# EAGLE board CoreExpansion (EAGLE 5.06)

Size 86.36 x 40.64 mm. Coordinates in mm from the lower left corner, seen from the top.
Outline: 0,0 86.36,0 86.36,40.64 0,40.64 0,0
Copper layers (1*16): Top 0.035mm / dielectric 1.5mm / Bottom 0.035mm
Design rules "default": minimum track width 10mil, minimum drill 0.6mm, track to track 8mil, track to pad 8mil, pad to pad 8mil, via to via 8mil, smd to smd 8mil, copper to edge 40mil, drill to drill 8mil, minimum pad ring 10mil, minimum via ring 8mil, stop-mask expansion 4mil, vias tented up to drill 0mil, thermal gap 10mil

## Footprints (pad centres in the part's own frame; a part is rotated, then mirrored left to right if it is on the bottom)
2X05/SHROUDED = drill 1.016 square: 1 -5.08,-1.27 | drill 1.016 octagon: 2 -5.08,1.27; 3 -2.54,-1.27; 4 -2.54,1.27; 5 0,-1.27; 6 0,1.27; 7 2.54,-1.27; 8 2.54,1.27; 9 5.08,-1.27; 10 5.08,1.27
C0805 = smd 1.3 x 1.5: 1 -0.95,0; 2 0.95,0
2X32/NOSILK = drill 1.016 octagon: 1 -39.37,-1.27; 2 -39.37,1.27; 3 -36.83,-1.27; 4 -36.83,1.27; 5 -34.29,-1.27; 6 -34.29,1.27; 7 -31.75,-1.27; 8 -31.75,1.27; 9 -29.21,-1.27; 10 -29.21,1.27; 11 -26.67,-1.27; 12 -26.67,1.27; 13 -24.13,-1.27; 14 -24.13,1.27; 15 -21.59,-1.27; 16 -21.59,1.27; 17 -19.05,-1.27; 18 -19.05,1.27; 19 -16.51,-1.27; 20 -16.51,1.27; 21 -13.97,-1.27; 22 -13.97,1.27; 23 -11.43,-1.27; 24 -11.43,1.27; 25 -8.89,-1.27; 26 -8.89,1.27; 27 -6.35,-1.27; 28 -6.35,1.27; 29 -3.81,-1.27; 30 -3.81,1.27; 31 -1.27,-1.27; 32 -1.27,1.27; 33 1.27,-1.27; 34 1.27,1.27; 35 3.81,-1.27; 36 3.81,1.27; 37 6.35,-1.27; 38 6.35,1.27; 39 8.89,-1.27; 40 8.89,1.27; 41 11.43,-1.27; 42 11.43,1.27; 43 13.97,-1.27; 44 13.97,1.27; 45 16.51,-1.27; 46 16.51,1.27; 47 19.05,-1.27; 48 19.05,1.27; 49 21.59,-1.27; 50 21.59,1.27; 51 24.13,-1.27; 52 24.13,1.27; 53 26.67,-1.27; 54 26.67,1.27; 55 29.21,-1.27; 56 29.21,1.27; 57 31.75,-1.27; 58 31.75,1.27; 59 34.29,-1.27; 60 34.29,1.27; 61 36.83,-1.27; 62 36.83,1.27; 63 39.37,-1.27; 64 39.37,1.27
1X05 = drill 1.016 square: 1 0,0 | drill 1.016 octagon: 2 2.54,0; 3 5.08,0; 4 7.62,0; 5 10.16,0
TSSOP-14 = smd 1.422 x 0.356: 1 -2.921,1.981; 2 -2.921,1.321; 3 -2.921,0.66; 4 -2.921,0; 5 -2.921,-0.66; 6 -2.921,-1.321; 7 -2.921,-1.981; 8 2.921,-1.981; 9 2.921,-1.321; 10 2.921,-0.66; 11 2.921,0; 12 2.921,0.66; 13 2.921,1.321; 14 2.921,1.981

## Placement (x,y rotation side)
ADC1  M05X2SHROUDED  [2X05/SHROUDED]  11.43,34.29 180 top
C1  0.1uF  [C0805]  63.5,30.48 270 bottom
C2  1uF  [C0805]  68.58,30.48 270 bottom
C3  0.1uF  [C0805]  66.04,30.48 270 bottom
C4  0.1uF  [C0805]  63.5,17.78 270 bottom
C5  1uF  [C0805]  68.58,17.78 270 bottom
C6  0.1uF  [C0805]  66.04,17.78 270 bottom
EXT1  M05X2SHROUDED  [2X05/SHROUDED]  54.61,34.29 180 top
EXT2  M05X2SHROUDED  [2X05/SHROUDED]  54.61,21.59 180 top
J1  CARDSTAC_FULL_STD_ROWS_AB_2X32_NOSILK  [2X32/NOSILK]  43.18,11.43 0 top
MOTOR1&2  M05X2SHROUDED  [2X05/SHROUDED]  33.02,34.29 180 top
MOTOR3&4  M05X2SHROUDED  [2X05/SHROUDED]  33.02,21.59 180 top
PWM1  M05X2SHROUDED  [2X05/SHROUDED]  11.43,21.59 180 top
RC1  M05PTH  [1X05]  82.55,36.83 180 top
RC1&2_LCV  MAX3393EEUD+  [TSSOP-14]  66.04,35.56 180 bottom
RC2  M05PTH  [1X05]  82.55,30.48 180 top
RC3  M05PTH  [1X05]  82.55,24.13 180 top
RC3&4_LVC  MAX3393EEUD+  [TSSOP-14]  66.04,22.86 180 bottom
RC4  M05PTH  [1X05]  82.55,17.78 180 top

## Library data of the parts
ADC1 C1-C6 EXT1 EXT2 J1 MOTOR1&2 MOTOR3&4 PWM1 RC1 RC1&2_LCV RC2 RC3 RC3&4_LVC RC4 = Robot

## Nets
3.3V: ADC1.2 C1.1 C4.1 EXT1.2 EXT2.2 J1.63 PWM1.2 RC1&2_LCV.1 RC1&2_LCV.8 RC3&4_LVC.1 RC3&4_LVC.8
5V: C2.1 C3.1 C5.1 C6.1 J1.64 RC1&2_LCV.14 RC1.4 RC2.4 RC3&4_LVC.14 RC3.4 RC4.4
ADC1_CLK: ADC1.3
ADC1_CS: ADC1.9
ADC1_MISO: ADC1.5
ADC1_MOSI: ADC1.7
EXT1_0: EXT1.3
EXT1_1: EXT1.4
EXT1_2: EXT1.5
EXT1_3: EXT1.6
EXT1_4: EXT1.7
EXT1_5: EXT1.8
EXT1_6: EXT1.9
EXT1_7: EXT1.10
EXT2_0: EXT2.3
EXT2_1: EXT2.4
EXT2_2: EXT2.5
EXT2_3: EXT2.6
EXT2_4: EXT2.7
EXT2_5: EXT2.8
EXT2_6: EXT2.9
GND: ADC1.1 C1.2 C2.2 C3.2 C4.2 C5.2 C6.2 EXT1.1 EXT2.1 J1.1 J1.13 J1.25 J1.37 J1.49 J1.61 MOTOR1&2.1 MOTOR1&2.6 MOTOR3&4.1 MOTOR3&4.6 PWM1.1 RC1&2_LCV.7 RC1.1 RC2.1 RC3&4_LVC.7 RC3.1 RC4.1
MOT1_BRAKE: MOTOR1&2.5
MOT1_DIR: MOTOR1&2.4
MOT1_PWM: MOTOR1&2.3
MOT2_BRAKE: MOTOR1&2.10
MOT2_DIR: MOTOR1&2.9
MOT2_PWM: MOTOR1&2.8
MOT3_BRAKE: MOTOR3&4.5
MOT3_DIR: MOTOR3&4.4
MOT3_PWM: MOTOR3&4.3
MOT4_BRAKE: MOTOR3&4.10
MOT4_DIR: MOTOR3&4.9
MOT4_PWM: MOTOR3&4.8
N$9: J1.60
N$10: J1.58
N$11: J1.56
N$12: J1.54
N$13: J1.52
N$14: J1.50
N$15: J1.48
N$16: J1.46
N$17: J1.44
N$18: J1.42
N$19: J1.40
N$20: J1.38
N$21: J1.36
N$22: J1.34
N$23: J1.32
N$24: J1.30
N$25: J1.28
N$26: J1.26
N$27: J1.24
N$28: J1.22
N$29: J1.20
N$30: J1.18
N$31: J1.16
N$32: J1.14
N$33: J1.12
N$34: J1.10
N$41: J1.7
N$42: J1.9
N$43: J1.11
N$44: J1.15
N$45: J1.17
N$46: J1.19
N$47: J1.21
N$48: J1.23
N$49: J1.27
N$50: J1.29
N$51: J1.31
N$52: J1.33
N$53: J1.35
N$54: J1.39
N$55: J1.41
N$56: J1.43
N$57: J1.45
N$58: J1.47
N$60: J1.53
N$61: J1.55
N$62: J1.57
PWM1_CH0: PWM1.3
PWM1_CH1: PWM1.4
PWM1_CH2: PWM1.5
PWM1_CH3: PWM1.6
PWM1_CH4: PWM1.7
PWM1_CH5: PWM1.8
PWM1_CH6: PWM1.9
PWM1_CH7: PWM1.10
RC1_CHA: RC1&2_LCV.2
RC1_CHA_5: RC1&2_LCV.13 RC1.3
RC1_CHB: RC1&2_LCV.3
RC1_CHB_5: RC1&2_LCV.12 RC1.5
RC2_CHA: RC1&2_LCV.4
RC2_CHA_5: RC1&2_LCV.11 RC2.3
RC2_CHB: RC1&2_LCV.5
RC2_CHB_5: RC1&2_LCV.10 RC2.5
RC3_CHA: RC3&4_LVC.2
RC3_CHA_5: RC3&4_LVC.13 RC3.3
RC3_CHB: RC3&4_LVC.3
RC3_CHB_5: RC3&4_LVC.12 RC3.5
RC4_CHA: RC3&4_LVC.4
RC4_CHA_5: RC3&4_LVC.11 RC4.3
RC4_CHB: RC3&4_LVC.5
RC4_CHB_5: RC3&4_LVC.10 RC4.5
VAUX1_12V: J1.62

## Tracks (layer width: path | path; a pad name or v marks a point on that pad's centre or on a via)
3.3V  (10 unrouted)
5V  (10 unrouted)
GND  (25 unrouted)
RC1_CHA_5  (1 unrouted)
RC1_CHB_5  (1 unrouted)
RC2_CHA_5  (1 unrouted)
RC2_CHB_5  (1 unrouted)
RC3_CHA_5  (1 unrouted)
RC3_CHB_5  (1 unrouted)
RC4_CHA_5  (1 unrouted)
RC4_CHB_5  (1 unrouted)